# Allegro board USB2_ETH_RTL8152_1V0.brd
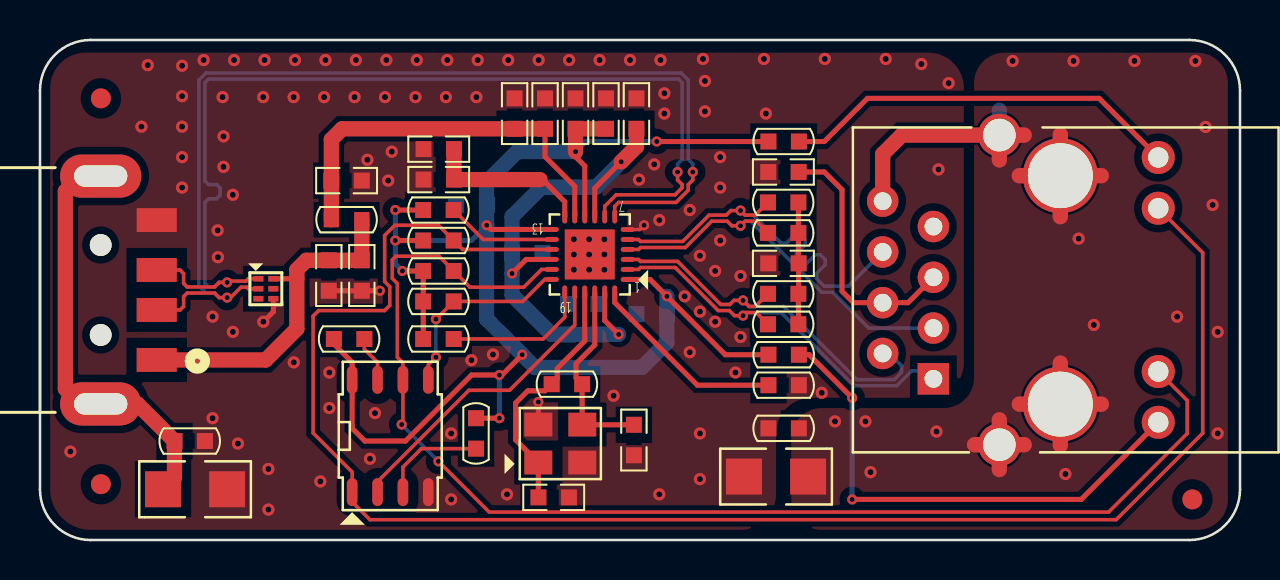
[diagram p0: board, top side]
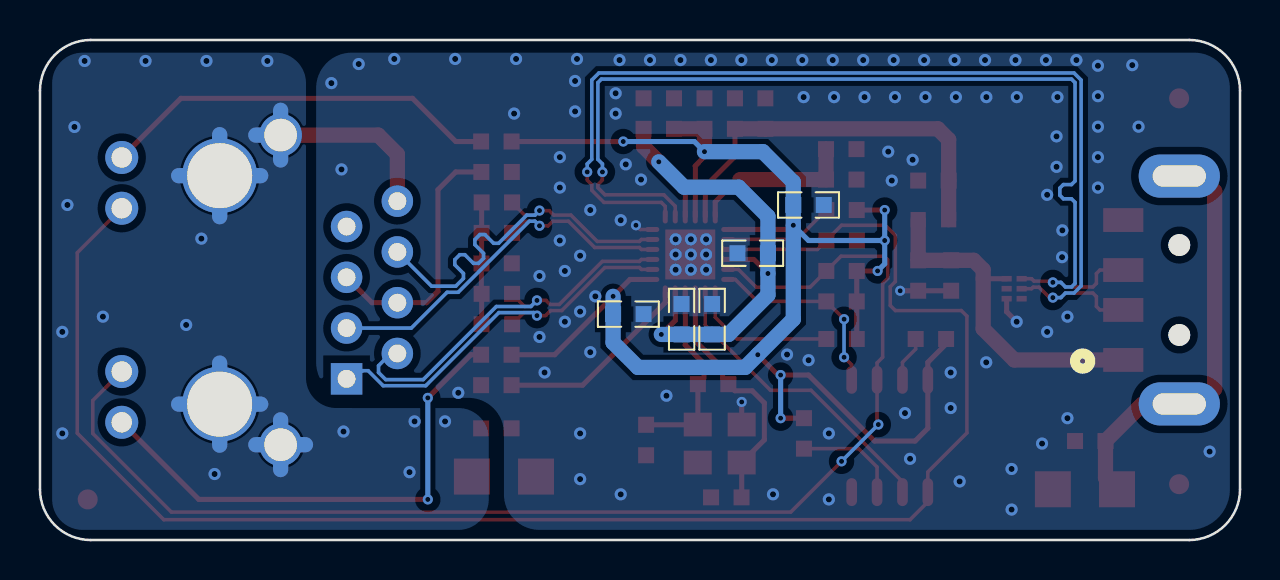
[diagram p1: board, bottom side, seen from below]

Outline 60.05 x 25.02 mm; copper layers: TOP, BOTTOM. Coordinates in mm from the lower left corner of the outline.
Outline path: 0,22.48 0,2.54 arc(0.74,0.74) 2.54,0 57.51,0 arc(59.3,0.74) 60.05,2.54 60.05,22.48 arc(59.3,24.28) 57.51,25.02 2.54,25.02 arc(0.74,24.28) 0,22.48

## Design rules (mm)
net group MDI_DP1: nets MDIN0 MDIP0
net group MDI_DP2: nets MDIN1 MDIP1
net group USB_DP1: nets USB_DM USB_DP

## Placement (name value [footprint] x y rotation side)
C1  10UF  [C0603]  16.1 13.23 270 top
C2  100nF  [C0603]  14.45 13.23 270 top
C3  100nF  [C0603]  15.34 17.98 0 top
C4  100nF  [C0603]  37.2 13.84 180 top
C5  1nF  [C1206]  7.76 2.54 0 top
C6  10UF  [C0603]  23.75 21.34 90 top
C7  4.7uF  [C0603]  26.8 21.34 90 top
C8  100nF  [C0603]  28.32 21.34 90 top
C9  100nF  [C0603]  21.59 16.76 180 bottom
C10  100nF  [C0603]  30.61 11.3 180 bottom
C11  100nF  [C0603]  25.27 21.34 90 top
C12  4.7uF  [C0603]  27.94 11.05 90 bottom
C13  100nF  [C0603]  26.42 11.05 90 bottom
C14  100nF  [C0603]  24.38 14.35 0 bottom
C15  100nF  [C0603]  29.84 21.34 90 top
C16  4.7uF  [C0603]  19.95 18.03 180 top
C17  100nF  [C0603]  19.95 19.56 180 top
C18  27pF  [C0603]  25.7 2.13 0 top
C19  100nF  [C0603]  37.2 18.41 0 top
C20  27pF  [C0603]  29.72 5 90 top
C21  1nF  [C1206]  36.83 3.17 180 top
F1  JFC0603-075FS  [FUSE0603]  15.34 16.03 180 top
J1  USB2.0_TYPE_A  [CONN4_1-1734028-1_TEC]  -5.08 12.51 270 top
J2  HR911105A  [CON_RJ45_HR911105A]  44.7 8.06 270 top
NOREF  -  [unnamed]  3.05 2.79 0 top
NOREF#2  -  [unnamed]  57.66 2.03 0 top
NOREF#3  -  [unnamed]  3.05 22.1 0 top
NOREF#4  -  [#2]  166.01 -5.74 0 top
R1  49.9R  [R0603]  37.19 10.79 0 top
R2  1M  [R0603]  7.49 4.95 0 top
R3  49.9R  [R0603]  37.19 12.32 0 top
R4  49.9R  [R0603]  37.19 15.37 0 top
R5  49.9R  [R0603]  37.19 16.89 0 top
R6  10K  [R0603]  19.94 10.06 0 top
R7  2.49K  [R0603]  37.21 7.75 180 top
R8  10K  [R0603]  19.94 16.51 0 top
R9  10K  [R0603]  19.94 11.94 0 top
R10  330R  [R0603]  37.21 19.94 180 top
R11  10K  [R0603]  19.94 14.99 0 top
R12  10K  [R0603]  19.94 13.46 0 top
R13  1M_DNP  [R0603]  26.37 7.8 0 top
R14  330R  [R0603]  37.21 9.27 180 top
R15  10K  [R0603]  15.47 10.06 180 top
R16  10K  [R0603]  21.82 5.33 270 top
R17  1M  [R0603]  37.21 5.59 180 top
U1  TPD4S012  [DFN6_050_145X100]  11.3 12.57 270 top
U2  RTL8152B-VB-CG  [QFN24_050_400X400]  27.51 14.29 180 top
U3  MX25L4006E  [SOP8_127_490X390]  17.53 5.21 0 top
Y1  25.000MHz  [XTAL4_320X250]  26.04 4.83 0 top

## Library data of the parts
C1-C21 = CAP_NP
F1 = FUSE
J1 = USB2_0_TYPEA_M
J2 = HY911105T
R1-R17 = RES_SMD
U1 = TPD4S012: User Part Number: HAMP; Tolerance: #TOL
U2 = RTL8152B-VB-CG
U3 = MX25L4006E
Y1 = XTAL2

## Footprints (pads in the part's own frame, mm; a bottom-side part is the same pattern mirrored in y, then rotated)
C0603
  rect 0.8x0.8 smd: 1(-0.762,0) 2(0.762,0)
C1206
  rect 1.8x1.8 smd: 1(-1.604,0) 2(1.604,0)
CON_RJ45_HR911105A
  rect 1.575x1.575 hole 0.889: 1(0,0)
  round 1.575 hole 0.889: 2(-1.27,-2.54) 3(-2.54,0) 4(-3.81,-2.54) 5(-5.08,0) 6(-6.35,-2.54) 7(-7.62,0) 8(-8.89,-2.54)
  round 1.651 hole 1.02: 9(2.175,11.25) 10(-0.365,11.25) 11(-8.535,11.25) 12(-11.075,11.25)
  round 3.75 hole 3.25: 13(1.265,6.35) 14(-10.165,6.35)
  round 2.13 hole 1.63: 15(3.295,3.3) 16(-12.195,3.3)
CONN4_1-1734028-1_TEC
  round 1.092 hole 1.09 unplated: (-2.25,8.119) (2.25,8.119)
  rect 1.194x2.007 smd: 1(3.5,10.922) 2(1,10.922) 3(-1,10.922) 4(-3.5,10.922)
  oval 2.159x4.064 hole 1.067x2.667: 5(-5.7,8.119) 6(5.7,8.119)
DFN6_050_145X100
  rect 0.279x0.508 smd: 1(-0.5,-0.375) 2(0,-0.375) 3(0.5,-0.375) 4(0.5,0.375) 5(0,0.375) 6(-0.5,0.375)
FUSE0603
  rect 0.762x0.762 smd: 1(-0.762,0) 2(0.762,0)
QFN24_050_400X400
  oval 0.7x0.25 smd: 1(-1.9,1.25) 2(-1.9,0.75) 3(-1.9,0.25) 4(-1.9,-0.25) 5(-1.9,-0.75) 6(-1.9,-1.25) 13(1.9,-1.25) 14(1.9,-0.75) 15(1.9,-0.25) 16(1.9,0.25) 17(1.9,0.75) 18(1.9,1.25)
  oval 0.25x0.7 smd: 7(-1.25,-1.9) 8(-0.75,-1.9) 9(-0.25,-1.9) 10(0.25,-1.9) 11(0.75,-1.9) 12(1.25,-1.9) 19(1.25,1.9) 20(0.75,1.9) 21(0.25,1.9) 22(-0.25,1.9) 23(-0.75,1.9) 24(-1.25,1.9)
  rect 2.5x2.5 smd: 25(0,0)
R0603
  rect 0.8x0.8 smd: 1(-0.762,0) 2(0.762,0)
SOP8_127_490X390
  oval 0.533x1.397 smd: 1(-1.905,-2.809) 2(-0.635,-2.809) 3(0.635,-2.809) 4(1.905,-2.809) 5(1.905,2.809) 6(0.635,2.809) 7(-0.635,2.809) 8(-1.905,2.809)
unnamed
  round 1.001 smd: (0,0)
XTAL4_320X250
  rect 1.4x1.19 smd: 1(-1.1,-0.95) 2(1.1,-0.95) 3(1.1,0.95) 4(-1.1,0.95)

## Nets
GND: C1.2(CAP2) C2.2(CAP2) C3.2(CAP2) C4.2(CAP2) C5.2(CAP2) C6.2(CAP2) C7.2(CAP2) C8.2(CAP2) C9.2(CAP2) C10.2(CAP2) C11.2(CAP2) C12.2(CAP2) C13.2(CAP2) C14.2(CAP2) C15.2(CAP2) C16.2(CAP2) C17.2(CAP2) C18.2(CAP2) C19.1(CAP1) C20.1(CAP1) C21.2(CAP2) J1.4(GND) R2.2 R7.1 R17.2 U1.4(GND) U2.6(U2GND) U2.25(GND) U3.4(VSS) Y1.2 Y1.4
GND_EARTH: C5.1(CAP1) J1.5(PTH_1) J1.6(PTH_2) R2.1
GND_F: C21.1(CAP1) J2.8(CHS_GND) J2.13(GND1) J2.14(GND2) J2.15(GND3) J2.16(GND4) R17.1
VBUS_5V: C1.1(CAP1) C2.1(CAP1) F1.1 J1.1(+5V) U1.6(VBUS)
VCC1V0: C12.1(CAP1) C13.1(CAP1) C14.1(CAP1) C15.1(CAP1) U2.9(U2VDD10) U2.16(DVDD10) U2.23(AVDD10)
VCC1V0_UPS: C16.1(CAP1) C17.1(CAP1) U2.12(DVDD10_UPS)
VCC3V3: C7.1(CAP1) C8.1(CAP1) C9.1(CAP1) C10.1(CAP1) R6.1 R8.1 R9.1 R10.2 R11.1 R12.1 R14.2 R15.2 R16.1 U2.1(AVDD33) U2.10(AVDD33_1) U2.13(DVDD33) U3.8(VCC)
VCC5V: C3.1(CAP1) C6.1(CAP1) C11.1(CAP1) F1.2 U2.11(VDD5)
CLK_25M_IN: C18.1(CAP1) R13.1 U2.21(CKXTAL1) Y1.1
CLK_25M_OUT: C20.2(CAP2) R13.2 U2.22(CKXTAL2) Y1.3
MDIN0: J2.2(TD-) R3.1 U2.3(MDIN0)
MDIN1: J2.6(RD-) R5.1 U2.5(MDIN1)
MDIP0: J2.1(TD+) R1.1 U2.2(MDIP0)
MDIP1: J2.3(RD+) R4.1 U2.4(MDIP1)
SPI_CLK_LED1: J2.10(LED_G_N) R12.2 U2.17(LED1/SPISCK) U3.6(SCLK)
SPI_CS_N_LED0: J2.11(LED_Y_N) R11.2 U2.15(LED0/SPICSB) U3.1(\\C\E)
SPI_SDI_XTALDET: R9.2 U2.18(SPISDI/XTALDET) U3.5(MOSI)
SPI_SDO: U2.20(SPISDO) U3.2(MISO)
USB_DM: J1.2(DATA-) U1.2(D-) U2.7(U2DM)
USB_DP: J1.3(DATA+) U1.1(D+) U2.8(U2DP)
N05841: R16.2 U3.3(\\W\P)
N05982: R15.1 U3.7(\\H\O\L\D)
N07618: R6.2 U2.19(LANWAKEB)
N07682: R7.2 U2.24(RSET)
N08502: R8.2 U2.14(GPIO)
N10045: C4.1(CAP1) R1.2 R3.2 R4.2 R5.2
N10641: C19.2(CAP2) J2.4(CT1) J2.5(CT2)
N12035: J2.12(LED_Y_P) R10.1
N12100: J2.9(LED_G_P) R14.1

Pads without a net: J2 7; U1 3 5

## Via types
v1: diameter 0.61, hole 0.305, TOP to BOTTOM, 117 vias
v2: diameter 0.508, hole 0.254, TOP to BOTTOM, 30 vias

## Routing (per net, layer and track width the routed paths; a pad name or vN(x,y) marks a point on that pad's centre or on a via; arc(x,y) is an arc through that point)
GND: length 6
  TOP w0.178: v2(30.23,15.75) 30.02,15.54 U2.6
  TOP w0.254: v1(11.18,10.92) 11.68,11.42 11.68,11.44 ; 11.68,11.43 11.68,11.44 ; 11.68,11.44 U1.4 ; C2.2 C1.2 v2(17.01,12.47) ; Y1.4 v2(24.94,6.91)
  vias: v1(1.52,4.43) v1(5.08,20.68) v1(5.39,23.76) v1(7.11,23.73) v1(7.11,22.21) v1(7.11,20.68) v1(7.11,19.16) v1(7.11,17.63) v1(8.19,24.01) v1(8.64,11.18) v1(8.64,6.1) v1(8.89,15.49) v1(8.91,14.15) v1(9.14,22.16) v1(9.18,20.2) v1(9.18,18.67) v1(9.71,24.01) v1(9.65,17.27) v1(9.65,10.41) v1(9.91,4.83) v1(11.24,24.01) v1(11.17,22.16) v1(11.43,3.56) v1(11.43,1.52) v1(12.69,22.16) v1(12.7,8.89) v1(12.76,24.01) v1(14.03,2.93) v1(14.22,22.16) v1(14.28,24.01) v1(14.48,8.38) v1(14.48,6.6) v1(15.74,22.16) v1(15.81,24.01) v1(16.38,19.02) v1(16.51,4.06) v1(16.76,6.35) v1(17.33,24.01) v1(17.26,22.16) v1(17.42,17.98) v1(17.6,19.43) v1(18.79,22.16) v1(18.86,24.01) v1(20.31,22.16) v1(20.38,24.01) v1(20.57,5.33) v1(20.57,2.03) v1(21.59,9) v1(21.84,22.16) v1(21.9,24.01) v1(22.67,9.28) v1(23.43,24.01) v1(23.37,2.29) v1(24.95,24.01) v1(26.48,24.01) v1(26.72,15.05) v1(26.72,14.29) v1(26.72,13.52) v1(27.48,15.05) v1(27.48,14.29) v1(27.48,13.52) v1(28,24.01) v1(28.24,15.05) v1(28.24,14.29) v1(28.24,13.52) v1(28.7,7.22) v1(29.52,24.01) v1(29.97,18.03) v1(30.73,18.8) v1(31.05,24.01) v1(30.99,16) v1(30.99,2.29) v1(31.24,22.35) v1(31.24,21.34) v1(32.26,12.19) v1(32.51,16.51) v1(32.51,9.4) v1(33.02,14.22) v1(33.02,11.43) v1(33.02,5.33) v1(33.02,3.05) v1(33.18,24.07) v1(33.27,22.97) v1(33.27,21.44) v1(33.78,13.46) v1(33.78,10.92) v1(34.03,19.16) v1(34.03,17.63) v1(34.04,14.99) v1(34.8,8.38) v1(35.05,13.21) v1(35.05,10.16) v1(36.22,24.07) v1(36.32,21.34) v1(39.12,7.37) v1(39.27,24.07) v1(42.32,24.07) v1(44.1,23.81) v1(44.96,18.54) v1(45.47,22.86)
GND_EARTH: length 21.2
  TOP w0.762: C5.1 6.73,3.12 R2.1 4.87,6.81 J1.6 2.03,6.81 1.27,7.57 1.27,17.45 2.03,18.21 J1.5
GND_F: length 57.6
  TOP w0.762: 49,6.8 J2.13 ; J2.13 51.05,8.85 ; J2.13 53.11,6.8 ; J2.13 51.05,4.75 ; J2.8 42.16,19.3 43.12,20.26 J2.16 ; J2.14 53.11,18.23 ; J2.14 51.05,20.28 ; J2.14 51.05,16.18 ; J2.14 49,18.23 ; J2.16 49.25,20.26 ; J2.16 48,19.02 ; 48,3.53 J2.15 ; J2.15 46.76,4.77 ; J2.15 48,6.01 ; J2.15 49.25,4.77
  BOTTOM w0.762: J2.14 51.05,20.28 ; J2.14 51.05,16.18 ; J2.14 53.11,18.23 ; J2.14 49,18.23 ; J2.16 49.25,20.26 ; J2.16 48,19.02 ; J2.16 48,21.5 ; 51.05,4.75 J2.13 ; J2.13 49,6.8 ; J2.13 53.11,6.8 ; J2.13 51.05,8.85 ; 46.76,4.77 J2.15 ; J2.15 48,6.01 ; J2.15 49.25,4.77 ; J2.15 48,3.53
  vias: v1(39.78,5.94) v1(41.3,5.94) v1(41.56,3.4) v1(44.86,5.43) v1(48.67,23.97) v1(51.31,3.3) v1(51.72,23.97) v1(51.97,15.08) v1(52.73,10.76) v1(54.76,23.97) v1(56.9,11.18) v1(57.81,23.97) v1(58.32,20.67) v1(58.67,16.76) v1(58.93,10.41) v1(58.93,5.33)
VBUS_5V: length 17.3
  TOP w0.254: U1.6 12.85,13.07
  TOP w0.762: F1.1 C1.1 C2.1 13.33,14 12.85,13.52 12.85,10.57 11.3,9.01 J1.1
VCC1V0: length 26.6
  TOP w0.254: v2(23.62,13.34) 24.32,14.04 U2.16 ; U2.23 28.26,10.98 v2(28.96,10.29) ; v2(29.08,18.92) 27.76,17.6 U2.9
  TOP w0.762: C15.1 29.84,19.68 v2(29.08,18.92)
  BOTTOM w0.762: v2(29.08,18.92) 27.81,17.65 25.09,17.65 23.62,16.19 C14.1 v2(23.62,13.34) 23.62,12.26 25.59,10.29 v2(28.96,10.29)
VCC1V0_UPS: length 8.3
  TOP w0.254: 25.02,18.03 25.15,18.03 26.26,16.92 U2.12
  TOP w0.762: 25.02,18.03 C16.1 C17.1
VCC3V3: length 86.7
  TOP w0.254: R15.2 14.71,9.8 15.62,8.89 U3.8 15.62,5.59 16.26,4.95 18.29,4.95 21.59,8.26 v2(22.99,8.26) 23.11,8.26 v2(24.13,9.27) ; U2.10 27.26,18.72 26.8,19.18 v2(26.8,19.43) ; R6.1 R9.1 R12.1 v2(18.14,13.46) ; v2(17.78,14.99) R11.1 ; R16.1 v2(22.99,6.1) ; v2(22.35,15.75) 22.56,15.54 U2.13 ; R14.2 34.29,9.27 v2(31.37,12.19) 30.52,13.04 U2.1 ; R10.2 v2(30.86,19.94) ; R8.1 v2(17.78,16.51)
  TOP w0.762: C8.1 C7.1 v2(26.8,19.43)
  BOTTOM w0.254: v2(22.99,6.1) v2(22.99,8.26) ; v2(18.14,13.46) 17.78,13.82 v2(17.78,14.99) ; v2(26.8,19.43) 27.3,19.94 v2(30.86,19.94) ; v2(22.35,15.75) 21.59,14.99 v2(17.78,14.99) ; v2(17.78,14.99) v2(17.78,16.51)
  BOTTOM w0.762: v2(31.37,12.19) C10.1 31.37,9.88 30.12,8.64 24.77,8.64 v2(24.13,9.27) 22.35,11.05 v2(22.35,15.75) C9.1 22.35,17.91 23.88,19.43 v2(26.8,19.43)
VCC5V: length 19.9
  TOP w0.254: C11.1 25.27,19.18 26.76,17.69 U2.11
  TOP w0.762: F1.2 C3.1 14.58,20.04 15.12,20.57 C6.1 C11.1
CLK_25M_IN: length 12.7
  TOP w0.254: C18.1 24.94,2.14 Y1.1 23.8,5.01 23.8,6.86 24.41,7.47 25.27,7.47 R13.1 25.88,8.08 25.88,8.59 27.26,9.96 U2.21
CLK_25M_OUT: length 9.7
  TOP w0.254: C20.2 27.15,5.77 Y1.3 27.13,5.78 R13.2 26.82,8.1 26.82,8.83 27.76,9.76 U2.22
MDIN0: length 19.6
  TOP w0.178: U2.3 29.95,14.04 30.05,13.94 31.91,13.94 34.06,11.79 34.52,11.79 34.72,11.99 v2(35.18,11.99) 35.48,11.69 35.79,11.69 R3.1
  BOTTOM w0.178: J2.2 42.82,9.01 43.11,8.72 43.11,8.38 42.75,8.03 40.87,8.03 37.21,11.68 35.48,11.68 v2(35.18,11.99)
MDIN1: length 20.5
  TOP w0.178: R5.1 35.79,16.26 35.28,16.26 v2(35.05,16.48) 34.57,16.48 34.34,16.26 33.48,16.26 32.16,14.94 30.05,14.94 29.95,15.04 U2.5
  BOTTOM w0.178: v2(35.05,16.48) 35.28,16.26 35.69,16.26 37.1,14.85 37.35,14.85 37.78,15.28 38.03,15.28 38.28,15.03 38.28,14.78 37.85,14.34 37.85,14.09 38.1,13.84 38.35,13.84 38.79,14.28 39.04,14.28 39.29,14.02 39.29,13.77 38.86,13.34 38.86,13.09 39.24,12.7 40.45,12.7 J2.6
MDIP0: length 19.9
  TOP w0.178: U2.2 29.95,13.54 30.05,13.64 31.78,13.64 33.94,11.48 34.49,11.48 34.75,11.23 v2(35.18,11.23) 35.33,11.38 35.84,11.38 R1.1
  BOTTOM w0.178: v2(35.18,11.23) 35.33,11.38 37.08,11.38 40.74,7.72 42.87,7.72 43.63,8.47 43.89,8.47 J2.1
MDIP1: length 20
  TOP w0.178: R4.1 35.84,15.95 35.28,15.95 v2(35.05,15.72) 34.62,15.72 34.39,15.95 33.6,15.95 32.29,14.64 30.05,14.64 29.95,14.54 U2.4
  BOTTOM w0.178: v2(35.05,15.72) 35.28,15.95 35.56,15.95 39.12,12.4 39.67,12.4 41.47,10.6 J2.3
SPI_CLK_LED1: length 64
  TOP w0.178: U2.17 25.09,13.54 24.21,12.65 21.51,12.65 R12.2 19.96,14.2 17.81,14.2 17.63,14.02 17.63,13.09 17.88,12.83 17.88,9.14 18.16,8.86 U3.6 18.16,5.84 v2(18.1,5.78) ; J2.10 57.4,6.98 57.4,5.33 53.47,1.4 22.48,1.4 v2(19.94,3.94)
  BOTTOM w0.178: v2(19.94,3.94) v2(18.1,5.78)
SPI_CS_N_LED0: length 83.7
  TOP w0.178: J2.11 58.18,14.37 58.18,5.35 53.85,1.02 16.51,1.02 15.62,1.91 U3.1 15.62,3.4 13.67,5.36 13.67,11.2 13.94,11.48 17.25,11.48 17.5,11.73 17.5,12.68 17.25,12.93 17.25,15.24 17.75,15.75 19.94,15.75 R11.2 21.15,14.54 U2.15
SPI_SDI_XTALDET: length 9.8
  TOP w0.178: U2.18 25.25,13.04 24.16,11.94 R9.2 v2(19.81,11.05) ; v2(19.81,9.14) 19.43,8.76 U3.5
  BOTTOM w0.178: v2(19.81,11.05) v2(19.81,9.14)
SPI_SDO: length 15.3
  TOP w0.178: U2.20 26.76,10.76 23.5,7.49 21.46,7.49 16.89,2.92 U3.2
USB_DM: length 53
  TOP w0.178: J1.2 7.01,11.51 7.19,11.69 7.19,12.18 7.36,12.36 8.74,12.36 8.96,12.13 v2(9.37,12.13) 9.54,12.13 10.06,12.65 10.35,12.65 10.43,12.57 U1.2 ; U2.7 28.76,16.69 28.96,16.89 31.83,16.89 32.44,17.5 32.44,17.78 32.66,18.01 v2(32.66,18.41)
  BOTTOM w0.178: v2(9.37,12.13) 8.96,12.13 8.74,12.36 8.31,12.36 7.95,12.71 7.95,23.01 8.31,23.37 32.08,23.37 32.44,23.01 32.44,19.05 32.66,18.82 v2(32.66,18.41)
USB_DP: length 52.6
  TOP w0.178: J1.3 7.01,13.51 7.19,13.33 7.19,12.84 7.36,12.66 8.74,12.66 8.96,12.89 v2(9.37,12.89) 9.43,12.95 10.31,12.95 10.43,13.07 U1.1 ; v2(31.9,18.41) 31.9,18.01 32.13,17.78 32.13,17.63 31.78,17.27 28.83,17.27 28.26,16.7 U2.8
  BOTTOM w0.178: v2(9.37,12.89) 8.96,12.89 8.74,12.66 8.43,12.66 8.26,12.84 8.26,16.89 8.43,17.07 8.84,17.07 9.02,17.25 9.02,17.61 8.84,17.78 8.43,17.78 8.26,17.96 8.26,22.89 8.43,23.06 31.95,23.06 32.13,22.89 32.13,19.05 31.9,18.82 v2(31.9,18.41)
N05841: length 5.3
  TOP w0.178: R16.2 19.08,4.57 18.16,3.65 U3.3
N05982: length 2.3
  TOP w0.178: U3.7 16.89,8.89 16.23,9.55 R15.1
N07618: length 7.2
  TOP w0.178: U2.19 26.26,11.15 25.17,10.06 R6.2
N07682: length 9.9
  TOP w0.254: U2.24 28.76,11.88 32.89,7.75 R7.2
N08502: length 5.5
  TOP w0.178: R8.2 22.17,15.04 U2.14
N10045: length 6.1
  TOP w0.254: R1.2 R3.2 37.96,12.33 C4.1 37.95,13.86 R4.2 R5.2
N10641: length 13
  TOP w0.254: J2.5 43.43,11.87 J2.4 40.7,11.87 40.13,12.45 40.13,17.53 39.24,18.41 C19.2
N12035: length 20.1
  TOP w0.254: R10.1 39.24,19.94 41.4,22.1 53,22.1 J2.12
N12100: length 25.6
  TOP w0.254: v2(40.64,2.03) 52.1,2.03 J2.9 ; v2(40.64,7.11) 38.48,9.27 R14.1
  BOTTOM w0.254: v2(40.64,2.03) v2(40.64,7.11)

## Copper pours and planes (outline as drawn; the poured copper is in the pictures)
GND on TOP: 2.54,0.51 1.1,1.1 0.51,2.54 0.51,22.61 1.03,23.86 2.29,24.38 44.45,24.38 45.71,23.86 46.23,22.61 46.23,8.89 45.71,7.63 44.45,7.11 38.61,7.11 37.35,6.59 36.83,5.33 36.83,2.29 36.31,1.03 35.05,0.51 ; 9 cut-outs
GND on BOTTOM: 2.54,0.51 1.1,1.1 0.51,2.54 0.51,22.61 1.03,23.86 2.29,24.38 44.45,24.38 45.71,23.86 46.23,22.61 46.23,8.89 45.71,7.63 44.45,7.11 38.61,7.11 37.35,6.59 36.83,5.33 36.83,2.29 36.31,1.03 35.05,0.51 ; 2 cut-outs
GND_F on TOP: 39.12,0.51 38.04,0.95 37.59,2.03 37.59,5.08 38.04,6.16 39.12,6.6 45.21,6.6 46.29,7.05 46.74,8.13 46.74,22.86 47.18,23.94 48.26,24.38 57.91,24.38 58.99,23.94 59.44,22.86 59.44,2.03 58.99,0.95 57.91,0.51 ; 1 cut-out
GND_F on BOTTOM: 39.12,0.51 38.04,0.95 37.59,2.03 37.59,5.08 38.04,6.16 39.12,6.6 45.21,6.6 46.29,7.05 46.74,8.13 46.74,22.86 47.18,23.94 48.26,24.38 57.91,24.38 58.99,23.94 59.44,22.86 59.44,2.03 58.99,0.95 57.91,0.51

## Text on the board
Board Geometry/Soldermask Bottom: SOLDERMASK BOT
Package Geometry/Pastemask Bottom: PASTEMASK BOT
Ref Des/Silkscreen Bottom: SILKSCREEN BOT
TOP: ARTWORK TOP
Board Geometry/Soldermask Top: SOLDERMASK TOP
Package Geometry/Pastemask Top: PASTEMASK TOP
Ref Des/Silkscreen Top: SILKSCREEN TOP
DIMENSION: FAB DRAWING
User.9: ARTWORK BOT
User.10: ARTWORK GND02
User.11: ARTWORK POWER03
User.15: FIGURE | SIZE | 10.0 | 12.0 | 35.0 | 40.161 | 64.169 | 127.949 | 42.902 | 105.0x42.0 | DRILL CHART: TOP to BOTTOM | ALL UNITS ARE IN MILS | PLATED | NON-PLATED | QTY | 30 | 117 | 8 | 4 | 2
